# EAGLE board environmental monitor (EAGLE 7.5.0)
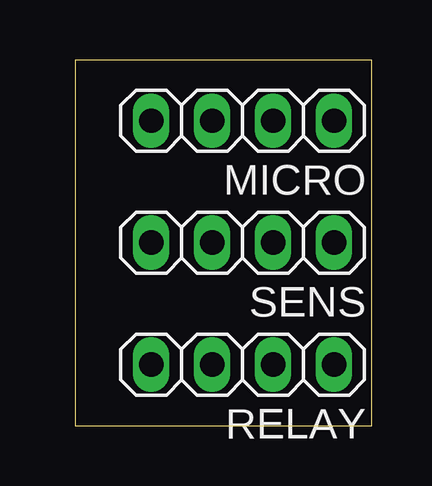
[diagram p0: board, top side]
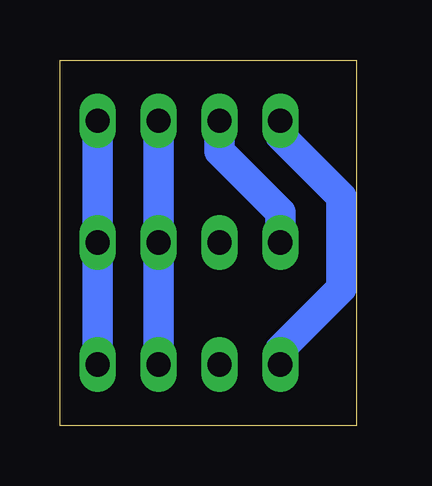
[diagram p1: board, bottom side, seen from below]

Size 12.37 x 15.23 mm. Coordinates in mm from the lower left corner, seen from the top.
Outline: 0,0 12.37,0 12.37,15.23 0,15.23 0,0
Copper layers (1*16): Top 0.035mm / dielectric 1.5mm / Bottom 0.035mm
Design rules "Othermill-DRC-1-32": minimum track width 8mil, minimum drill 0.8mm, track to track 0.794003125mm, track to pad 0.794003125mm, pad to pad 0.794003125mm, via to via 0.794003125mm, smd to smd 0mil, copper to edge 0mil, drill to drill 1mil, minimum pad ring 10mil, minimum via ring 10mil, stop-mask expansion 1mil, vias tented up to drill 30mil, thermal gap 10mil

## Footprints (pad centres in the part's own frame; a part is rotated, then mirrored left to right if it is on the bottom)
1X04 = drill 1.016 long: 1 -3.81,0; 2 -1.27,0; 3 1.27,0; 4 3.81,0

## Placement (x,y rotation side)
MICRO  [1X04]  6.98,12.7 180 top
RELAY  [1X04]  6.98,2.54 180 top
SENS  [1X04]  6.98,7.62 180 top

## Library data of the parts
MICRO RELAY SENS = pinhead

## Nets
GND: MICRO.1 RELAY.1 SENS.1
PWR: MICRO.2 RELAY.2 SENS.2
RELAY: MICRO.4 RELAY.4
SENS: MICRO.3 SENS.4

## Tracks (layer width: path | path; a pad name or v marks a point on that pad's centre or on a via)
GND
  Bottom 1.27: MICRO.1 SENS.1 RELAY.1
PWR
  Bottom 1.27: MICRO.2 SENS.2 RELAY.2
RELAY
  Bottom 1.27: MICRO.4 3.17,12.06 0.64,9.53 0.64,5.71 3.17,3.17 RELAY.4
SENS
  Bottom 1.27: SENS.4 3.17,8.89 5.71,11.43 MICRO.3